# EAGLE board digitizer (EAGLE 9.6.1)
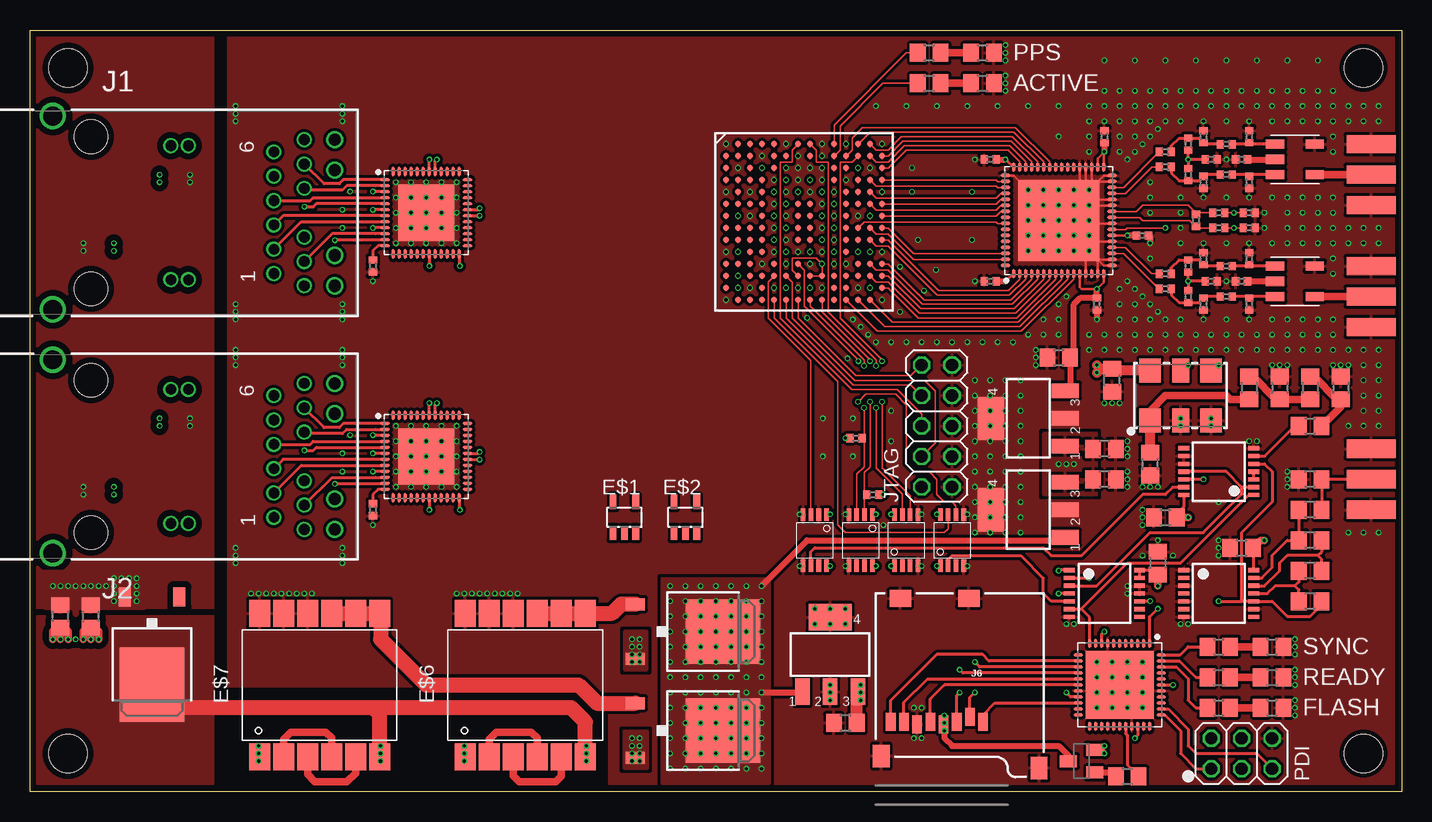
[diagram p0: board, top side]
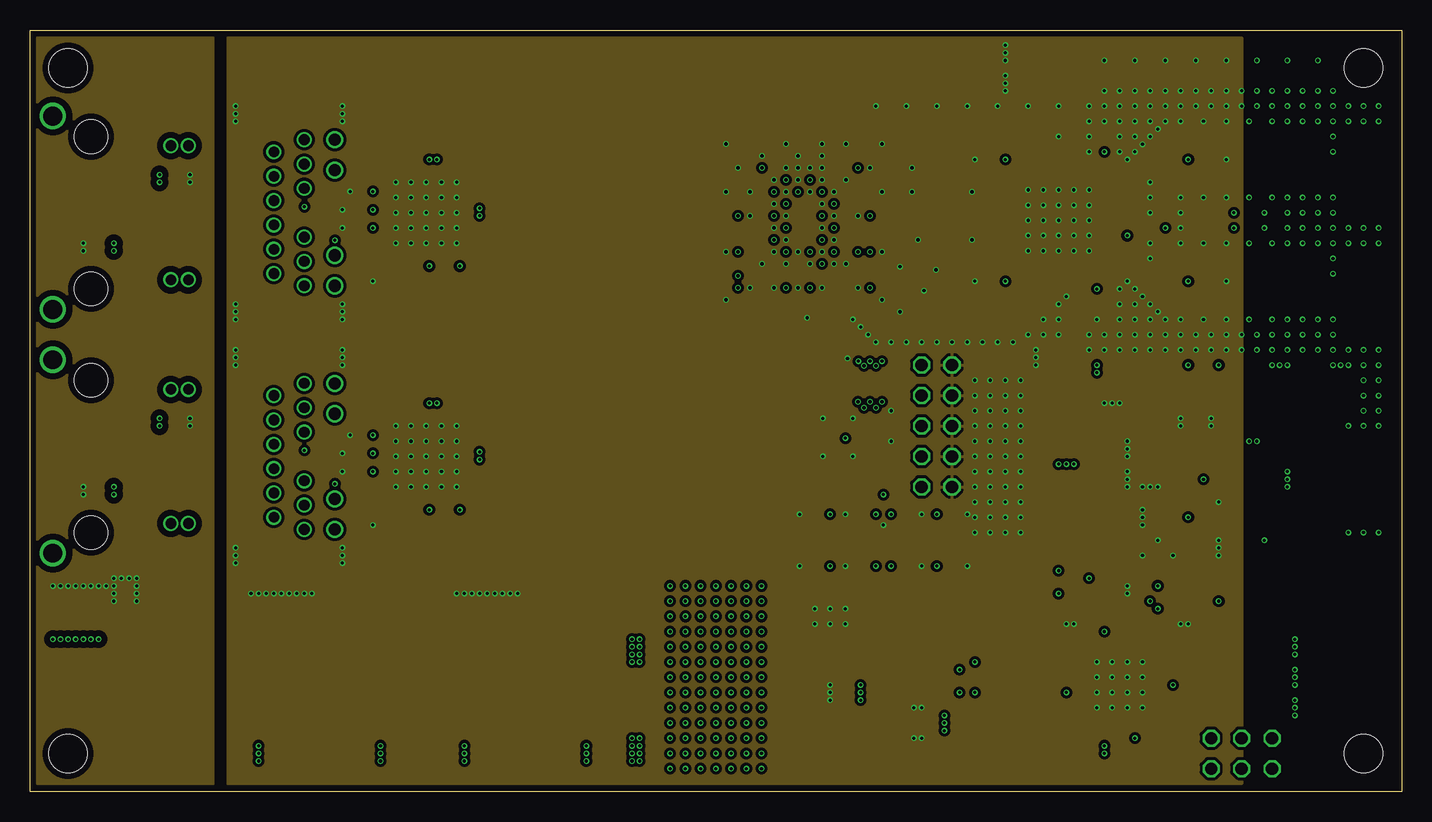
[diagram p1: board, inner layer Route2]
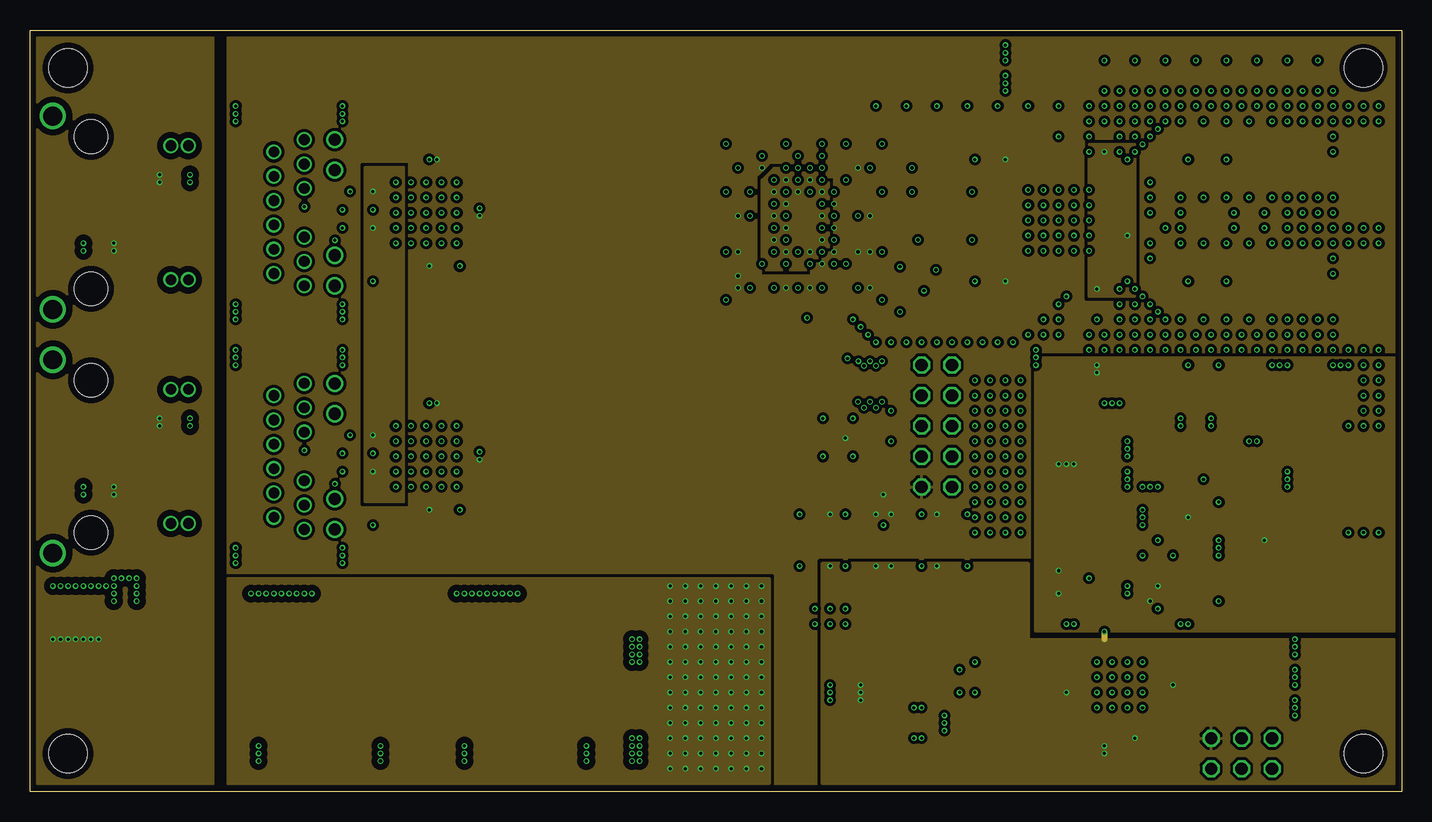
[diagram p2: board, inner layer Route15]
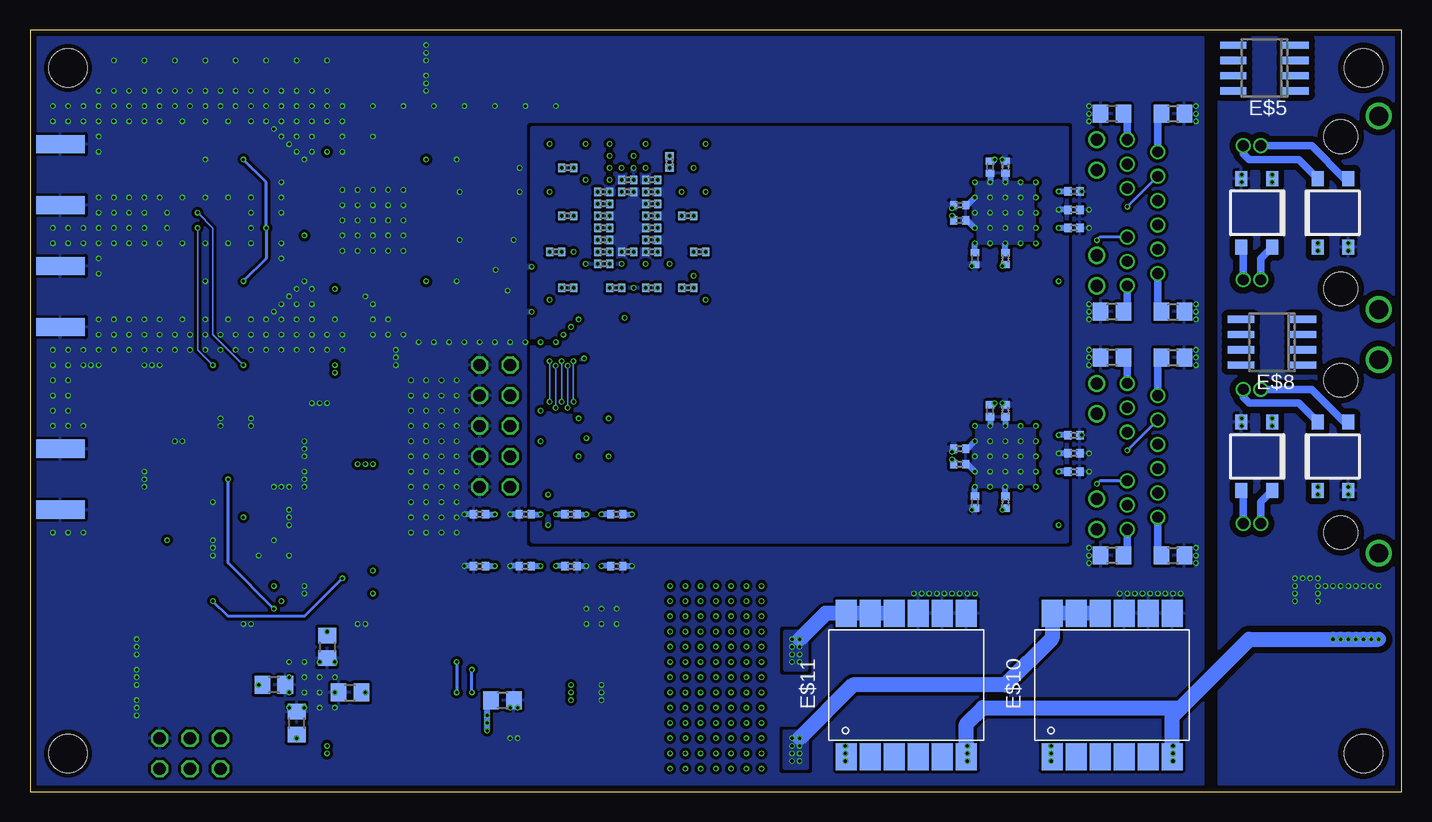
[diagram p3: board, bottom side, seen from below]

Size 114.3 x 63.5 mm. Coordinates in mm from the lower left corner, seen from the top.
Outline: 0,0 0,63.5 114.3,63.5 114.3,0 0,0
Copper layers (1*2*15*16): Top 0.0356mm / dielectric 0.17mm / Route2 0.0178mm / dielectric 47mil / Route15 0.0178mm / dielectric 0.17mm / Bottom 0.0356mm
Design rules "four_layer *": minimum track width 5mil, minimum drill 10mil, track to track 5mil, track to pad 5mil, pad to pad 5mil, via to via 5mil, smd to smd 5mil, copper to edge 15mil, drill to drill 5mil, minimum pad ring 4mil, minimum via ring 4mil, stop-mask expansion 4mil, vias tented up to drill 0mil, thermal gap 10mil
Holes 3.17 mm at 3.17,60.33 3.17,3.17 111.12,3.17 111.12,60.33

## Footprints (pad centres in the part's own frame; a part is rotated, then mirrored left to right if it is on the bottom)
R0805 = smd 1.3 x 1.5: 1 -0.95,0; 2 0.95,0
R0402 = smd 0.6 x 0.7: 1 -0.5,0; 2 0.5,0
TO-269AA = smd 1 x 1.25: + -1.28,-2.855; - 1.28,-2.855; AC1 -1.28,2.855; AC2 1.28,2.855
TO252 = smd 1 x 1.6: 1 -2.28,-4.8; 2 2.28,-4.8 | smd 5.4 x 6.2: 3 0,2.5
SOT23-5L = smd 0.55 x 1.2: 1 -0.95,-1.3; 2 0,-1.3; 3 0.95,-1.3; 4 0.95,1.3; 5 -0.95,1.3
MICRO8 = smd 0.38 x 1.05: 1 -0.975,-2.125; 2 -0.325,-2.125; 3 0.325,-2.125; 4 0.975,-2.125; 5 0.975,2.125; 6 0.325,2.125; 7 -0.325,2.125; 8 -0.975,2.125
SOIC8 = smd 0.6 x 2.2: 1 -1.905,-2.6; 2 -0.635,-2.6; 3 0.635,-2.6; 4 1.905,-2.6; 5 1.905,2.6; 6 0.635,2.6; 7 -0.635,2.6; 8 -1.905,2.6
WE-POE_ER11/5 = smd 2.25 x 1.75: 1 -5.975,5; 2 -5.975,3; 3 -5.975,1; 4 -5.975,-1; 5 -5.975,-3; 6 -5.975,-5; 7 5.975,-5; 8 5.975,-3; 9 5.975,-1; 10 5.975,1; 11 5.975,3; 12 5.975,5
7499811420 = drill 0.89: 1 -5.075,-15.24; 2 -3.045,-15.24; 3 -1.015,-15.24; 4 1.015,-15.24; 5 3.045,-15.24; 6 5.075,-15.24; 7 -6.09,-17.78; 8 -4.06,-17.78; 9 -2.03,-17.78; 10 2.03,-17.78; 11 4.06,-17.78; 12 6.09,-17.78 | drill 0.89 pad 1.168: 13 -5.59,-8.12; 14 5.59,-8.12; 15 -5.59,-6.66; 16 5.59,-6.66 | drill 1.02: 17 -6.09,-20.32; 18 -3.555,-20.32; 19 3.555,-20.32; 20 6.09,-20.32 | drill 1.57: Z1 -8.065,3.18; Z2 8.065,3.18 | hole 2.8: -6.35,0; 6.35,0
SMA-EDGE = smd 1.524 x 4.064: GND@0 0,0; GND@1 5.08,0; SIG 2.54,0 | smd 1.524 x 4.064 bottom: GND@2 0,0; GND@3 5.08,0
MICRO-SD-SOCKET = smd 1.8 x 1.4: CD1 -2.05,0.4; CD2 -7.75,0.4 | smd 0.8 x 1.5: CS -7.84,10.3; DI -6.74,10.7; DO -2.34,10.7; GND -3.44,10.9; RSV1 -8.94,10.7; RSV2 -1.24,10.7; SCLK -4.54,10.7; VCC -5.64,10.9 | smd 1.4 x 1.9: GND1 -13.6,14.55; GND3 -0.45,13.55
2X05 = drill 1.016 octagon: 1 -5.08,-1.27; 2 -5.08,1.27; 3 -2.54,-1.27; 4 -2.54,1.27; 5 0,-1.27; 6 0,1.27; 7 2.54,-1.27; 8 2.54,1.27; 9 5.08,-1.27; 10 5.08,1.27
2X03 = drill 1.016 octagon: 1 -2.54,-1.27; 2 -2.54,1.27; 3 0,-1.27; 4 0,1.27; 5 2.54,-1.27; 6 2.54,1.27
SOT23-BEC = smd 1 x 1.4: B -0.95,-1.1; C 0,1.1; E 0.95,-1.1
RF_BALUN_2.54 = smd 0.762 x 1.524: 1 1.27,-1.651; 2 0,-1.651; 3 -1.27,-1.651; 4 -1.27,1.651; 6 1.27,1.651
TSSOP14 = smd 0.35 x 0.9: 1 -1.95,-2.925; 2 -1.3,-2.925; 3 -0.65,-2.925; 4 0,-2.925; 5 0.65,-2.925; 6 1.3,-2.925; 7 1.95,-2.925; 8 1.95,2.925; 9 1.3,2.925; 10 0.65,2.925; 11 0,2.925; 12 -0.65,2.925; 13 -1.3,2.925; 14 -1.95,2.925
SOT223 = smd 1.219 x 2.235: 1 -2.311,-3.099; 2 0,-3.099; 3 2.311,-3.099 | smd 3.6 x 2.2: 4 0,3.099
QFN50P900X900X100-65T675 = smd 0.837 x 0.264: 1 -4.437,3.75; 2 -4.437,3.25; 3 -4.437,2.75; 4 -4.437,2.25; 5 -4.437,1.75; 6 -4.437,1.25; 7 -4.437,0.75; 8 -4.437,0.25; 9 -4.437,-0.25; 10 -4.437,-0.75; 11 -4.437,-1.25; 12 -4.437,-1.75; 13 -4.437,-2.25; 14 -4.437,-2.75; 15 -4.437,-3.25; 16 -4.437,-3.75; 33 4.437,-3.75; 34 4.437,-3.25; 35 4.437,-2.75; 36 4.437,-2.25; 37 4.437,-1.75; 38 4.437,-1.25; 39 4.437,-0.75; 40 4.437,-0.25; 41 4.437,0.25; 42 4.437,0.75; 43 4.437,1.25; 44 4.437,1.75; 45 4.437,2.25; 46 4.437,2.75; 47 4.437,3.25; 48 4.437,3.75 | smd 0.264 x 0.837: 17 -3.75,-4.437; 18 -3.25,-4.437; 19 -2.75,-4.437; 20 -2.25,-4.437; 21 -1.75,-4.437; 22 -1.25,-4.437; 23 -0.75,-4.437; 24 -0.25,-4.437; 25 0.25,-4.437; 26 0.75,-4.437; 27 1.25,-4.437; 28 1.75,-4.437; 29 2.25,-4.437; 30 2.75,-4.437; 31 3.25,-4.437; 32 3.75,-4.437; 49 3.75,4.437; 50 3.25,4.437; 51 2.75,4.437; 52 2.25,4.437; 53 1.75,4.437; 54 1.25,4.437; 55 0.75,4.437; 56 0.25,4.437; 57 -0.25,4.437; 58 -0.75,4.437; 59 -1.25,4.437; 60 -1.75,4.437; 61 -2.25,4.437; 62 -2.75,4.437; 63 -3.25,4.437; 64 -3.75,4.437 | smd 6.75 x 6.75: 65 0,0
FTGB196 = smd 0.508 x 0.508: A1 -6.5,6.5; A2 -5.5,6.5; A3 -4.5,6.5; A4 -3.5,6.5; A5 -2.5,6.5; A6 -1.5,6.5; A7 -0.5,6.5; A8 0.5,6.5; A9 1.5,6.5; A10 2.5,6.5; A11 3.5,6.5; A12 4.5,6.5; A13 5.5,6.5; A14 6.5,6.5; B1 -6.5,5.5; B2 -5.5,5.5; B3 -4.5,5.5; B4 -3.5,5.5; B5 -2.5,5.5; B6 -1.5,5.5; B7 -0.5,5.5; B8 0.5,5.5; B9 1.5,5.5; B10 2.5,5.5; B11 3.5,5.5; B12 4.5,5.5; B13 5.5,5.5; B14 6.5,5.5; C1 -6.5,4.5; C2 -5.5,4.5; C3 -4.5,4.5; C4 -3.5,4.5; C5 -2.5,4.5; C6 -1.5,4.5; C7 -0.5,4.5; C8 0.5,4.5; C9 1.5,4.5; C10 2.5,4.5; C11 3.5,4.5; C12 4.5,4.5; C13 5.5,4.5; C14 6.5,4.5; D1 -6.5,3.5; D2 -5.5,3.5; D3 -4.5,3.5; D4 -3.5,3.5; D5 -2.5,3.5; D6 -1.5,3.5; D7 -0.5,3.5; D8 0.5,3.5; D9 1.5,3.5; D10 2.5,3.5; D11 3.5,3.5; D12 4.5,3.5; D13 5.5,3.5; D14 6.5,3.5; E1 -6.5,2.5; E2 -5.5,2.5; E3 -4.5,2.5; E4 -3.5,2.5; E5 -2.5,2.5; E6 -1.5,2.5; E7 -0.5,2.5; E8 0.5,2.5; E9 1.5,2.5; E10 2.5,2.5; E11 3.5,2.5; E12 4.5,2.5; E13 5.5,2.5; E14 6.5,2.5; F1 -6.5,1.5; F2 -5.5,1.5; F3 -4.5,1.5; F4 -3.5,1.5; F5 -2.5,1.5; F6 -1.5,1.5; F7 -0.5,1.5; F8 0.5,1.5; F9 1.5,1.5; F10 2.5,1.5; F11 3.5,1.5; F12 4.5,1.5; F13 5.5,1.5; F14 6.5,1.5; G1 -6.5,0.5; G2 -5.5,0.5; G3 -4.5,0.5; G4 -3.5,0.5; G5 -2.5,0.5; G6 -1.5,0.5; G7 -0.5,0.5; G8 0.5,0.5; G9 1.5,0.5; G10 2.5,0.5; G11 3.5,0.5; G12 4.5,0.5; G13 5.5,0.5; G14 6.5,0.5; H1 -6.5,-0.5; H2 -5.5,-0.5; H3 -4.5,-0.5; H4 -3.5,-0.5; H5 -2.5,-0.5; H6 -1.5,-0.5; H7 -0.5,-0.5; H8 0.5,-0.5; H9 1.5,-0.5; H10 2.5,-0.5; H11 3.5,-0.5; H12 4.5,-0.5; H13 5.5,-0.5; H14 6.5,-0.5; J1 -6.5,-1.5; J2 -5.5,-1.5; J3 -4.5,-1.5; J4 -3.5,-1.5; J5 -2.5,-1.5; J6 -1.5,-1.5; J7 -0.5,-1.5; J8 0.5,-1.5; J9 1.5,-1.5; J10 2.5,-1.5; J11 3.5,-1.5; J12 4.5,-1.5; J13 5.5,-1.5; J14 6.5,-1.5; K1 -6.5,-2.5; K2 -5.5,-2.5; K3 -4.5,-2.5; K4 -3.5,-2.5; K5 -2.5,-2.5; K6 -1.5,-2.5; K7 -0.5,-2.5; K8 0.5,-2.5; K9 1.5,-2.5; K10 2.5,-2.5; K11 3.5,-2.5; K12 4.5,-2.5; K13 5.5,-2.5; K14 6.5,-2.5; L1 -6.5,-3.5; L2 -5.5,-3.5; L3 -4.5,-3.5; L4 -3.5,-3.5; L5 -2.5,-3.5; L6 -1.5,-3.5; L7 -0.5,-3.5; L8 0.5,-3.5; L9 1.5,-3.5; L10 2.5,-3.5; L11 3.5,-3.5; L12 4.5,-3.5; L13 5.5,-3.5; L14 6.5,-3.5; M1 -6.5,-4.5; M2 -5.5,-4.5; M3 -4.5,-4.5; M4 -3.5,-4.5; M5 -2.5,-4.5; M6 -1.5,-4.5; M7 -0.5,-4.5; M8 0.5,-4.5; M9 1.5,-4.5; M10 2.5,-4.5; M11 3.5,-4.5; M12 4.5,-4.5; M13 5.5,-4.5; M14 6.5,-4.5; N1 -6.5,-5.5; N2 -5.5,-5.5; N3 -4.5,-5.5; N4 -3.5,-5.5; N5 -2.5,-5.5; N6 -1.5,-5.5; N7 -0.5,-5.5; N8 0.5,-5.5; N9 1.5,-5.5; N10 2.5,-5.5; N11 3.5,-5.5; N12 4.5,-5.5; N13 5.5,-5.5; N14 6.5,-5.5; P1 -6.5,-6.5; P2 -5.5,-6.5; P3 -4.5,-6.5; P4 -3.5,-6.5; P5 -2.5,-6.5; P6 -1.5,-6.5; P7 -0.5,-6.5; P8 0.5,-6.5; P9 1.5,-6.5; P10 2.5,-6.5; P11 3.5,-6.5; P12 4.5,-6.5; P13 5.5,-6.5; P14 6.5,-6.5
QFN50P700X700X100-49T470 = smd 0.837 x 0.264: 1 -3.437,2.75; 2 -3.437,2.25; 3 -3.437,1.75; 4 -3.437,1.25; 5 -3.437,0.75; 6 -3.437,0.25; 7 -3.437,-0.25; 8 -3.437,-0.75; 9 -3.437,-1.25; 10 -3.437,-1.75; 11 -3.437,-2.25; 12 -3.437,-2.75; 25 3.437,-2.75; 26 3.437,-2.25; 27 3.437,-1.75; 28 3.437,-1.25; 29 3.437,-0.75; 30 3.437,-0.25; 31 3.437,0.25; 32 3.437,0.75; 33 3.437,1.25; 34 3.437,1.75; 35 3.437,2.25; 36 3.437,2.75 | smd 0.264 x 0.837: 13 -2.75,-3.437; 14 -2.25,-3.437; 15 -1.75,-3.437; 16 -1.25,-3.437; 17 -0.75,-3.437; 18 -0.25,-3.437; 19 0.25,-3.437; 20 0.75,-3.437; 21 1.25,-3.437; 22 1.75,-3.437; 23 2.25,-3.437; 24 2.75,-3.437; 37 2.75,3.437; 38 2.25,3.437; 39 1.75,3.437; 40 1.25,3.437; 41 0.75,3.437; 42 0.25,3.437; 43 -0.25,3.437; 44 -0.75,3.437; 45 -1.25,3.437; 46 -1.75,3.437; 47 -2.25,3.437; 48 -2.75,3.437 | smd 4.7 x 4.7: 49 0,0
QFN50P700X700X100-45T565 = smd 0.811 x 0.264: 1 -3.451,2.5; 2 -3.451,2; 3 -3.451,1.5; 4 -3.451,1; 5 -3.451,0.5; 6 -3.451,0; 7 -3.451,-0.5; 8 -3.451,-1; 9 -3.451,-1.5; 10 -3.451,-2; 11 -3.451,-2.5; 23 3.451,-2.5; 24 3.451,-2; 25 3.451,-1.5; 26 3.451,-1; 27 3.451,-0.5; 28 3.451,0; 29 3.451,0.5; 30 3.451,1; 31 3.451,1.5; 32 3.451,2; 33 3.451,2.5 | smd 0.264 x 0.811: 12 -2.5,-3.451; 13 -2,-3.451; 14 -1.5,-3.451; 15 -1,-3.451; 16 -0.5,-3.451; 17 0,-3.451; 18 0.5,-3.451; 19 1,-3.451; 20 1.5,-3.451; 21 2,-3.451; 22 2.5,-3.451; 34 2.5,3.451; 35 2,3.451; 36 1.5,3.451; 37 1,3.451; 38 0.5,3.451; 39 0,3.451; 40 -0.5,3.451; 41 -1,3.451; 42 -1.5,3.451; 43 -2,3.451; 44 -2.5,3.451 | smd 5.65 x 5.65: 45 0,0
OSCILLATOR-SMD-7.5X5.2-6PIN = smd 1.8 x 2: 1 -2.54,-2.1; 2 2.54,-2.1; 3 2.54,2.1; 4 -2.54,2.1 | smd 1.4 x 2: NC0 0,-2.1; NC1 0,2.1

## Placement (x,y rotation side)
C1  1n  [R0805]  106.68,23.5 180 top
C2  1n  [R0805]  106.68,18.41 180 top
C3  [R0805]  109.22,33.66 270 top
C4  [R0805]  104.14,33.66 270 top
C5  [R0805]  93.34,27.3 90 top
C6  [R0805]  90.17,34.29 90 top
C7  [R0805]  89.53,28.57 180 top
C8  [R0805]  89.53,26.04 180 top
C9  [R0805]  85.72,36.2 0 top
C10  [R0805]  94.61,22.86 0 top
C11  [R0805]  100.97,20.32 0 top
C12  [R0805]  93.98,19.05 270 top
C13  [R0805]  74.93,7.62 0 bottom
C14  [R0805]  19.05,56.52 0 bottom
C15  [R0805]  24.13,56.52 180 bottom
C16  [R0805]  24.13,40.01 180 bottom
C17  [R0805]  24.13,36.2 180 bottom
C18  [R0805]  19.05,40.01 0 bottom
C19  [R0805]  19.05,36.2 0 bottom
C20  [R0805]  19.05,19.68 0 bottom
C21  [R0805]  24.13,19.68 180 bottom
C22  [R0402]  27.3,50.04 0 bottom
C23  [R0402]  27.3,48.51 0 bottom
C24  [R0402]  27.3,46.99 0 bottom
C25  [R0402]  27.3,29.72 0 bottom
C26  [R0402]  27.3,28.19 0 bottom
C27  [R0402]  27.3,26.67 0 bottom
C28  [R0805]  2.54,14.61 90 top
C29  [R0805]  5.08,14.61 90 top
C30  [R0805]  67.94,5.71 180 top
C31  100n  [R0402]  59.5,48 180 bottom
C32  100n  [R0402]  58.5,45 0 bottom
C33  100n  [R0402]  59.5,42 180 bottom
C34  100n  [R0402]  62.5,42 0 bottom
C35  100n  [R0402]  65.5,42 180 bottom
C36  100n  [R0402]  69.5,42 0 bottom
C37  100n  [R0402]  69.5,48 0 bottom
C38  100n  [R0402]  70.5,45 180 bottom
C39  100n  [R0402]  66.5,49 0 bottom
C40  100n  [R0402]  66.5,47 0 bottom
C41  100n  [R0402]  66.5,45 0 bottom
C42  100n  [R0402]  66.5,44 0 bottom
C43  100n  [R0402]  66.5,50 0 bottom
C44  100n  [R0402]  64.5,50 0 bottom
C45  100n  [R0402]  62.5,50 0 bottom
C46  100n  [R0402]  62.5,51 0 bottom
C47  100n  [R0402]  64.5,51 0 bottom
C48  100n  [R0402]  62.5,49 0 bottom
C49  100n  [R0402]  62.5,48 0 bottom
C50  100n  [R0402]  62.5,47 0 bottom
C51  100n  [R0402]  62.5,46 0 bottom
C52  100n  [R0402]  62.5,45 0 bottom
C53  100n  [R0402]  64.5,45 0 bottom
C54  100n  [R0402]  66.5,46 0 bottom
C55  100n  [R0402]  66.5,48 0 bottom
C56  100n  [R0402]  61,52.5 90 bottom
C57  100n  [R0402]  69.5,52 180 bottom
C58  [R0805]  87.63,8.26 0 bottom
C59  [R0805]  89.53,12.06 270 bottom
C60  [R0805]  93.98,8.89 180 bottom
C61  [R0805]  92.08,5.71 90 bottom
C62  [R0402]  33.02,52.07 270 bottom
C63  [R0402]  34.29,52.07 270 bottom
C64  [R0402]  36.83,48.9 0 bottom
C65  [R0402]  36.83,47.62 0 bottom
C66  [R0402]  35.56,44.45 90 bottom
C67  [R0402]  33.02,44.45 90 bottom
C68  [R0402]  33.02,24.13 90 bottom
C69  [R0402]  35.56,24.13 90 bottom
C70  [R0402]  36.83,27.3 0 bottom
C71  [R0402]  36.83,28.57 0 bottom
C72  [R0402]  34.29,31.75 270 bottom
C73  [R0402]  33.02,31.75 270 bottom
C74  [R0402]  65.41,23.11 0 bottom
C75  [R0402]  69.22,23.11 0 bottom
C76  [R0402]  73.03,23.11 0 bottom
C77  [R0402]  69.22,18.8 0 bottom
C78  [R0402]  65.41,18.8 0 bottom
C79  [R0402]  73.03,18.8 0 bottom
C80  [R0402]  76.83,23.11 0 bottom
C81  [R0402]  76.83,18.8 0 bottom
C82  [R0402]  68.83,29.46 0 top
C83  [R0402]  70.23,24.77 0 top
D1  49.9  [R0805]  79.38,61.59 0 top
D2  49.9  [R0805]  79.38,59.05 0 top
D3  MB1S  [TO-269AA]  5.71,48.26 0 bottom
D4  MB1S  [TO-269AA]  12.06,48.26 180 bottom
D5  MB1S  [TO-269AA]  5.71,27.94 0 bottom
D6  MB1S  [TO-269AA]  12.06,27.94 180 bottom
D7  RBR10BM30AFH  [TO252]  55.24,13.34 270 top
D8  RBR10BM30AFH  [TO252]  55.24,5.08 270 top
D9  49.9  [R0805]  103.5,12.06 0 top
D10  49.9  [R0805]  103.5,9.53 0 top
D11  49.9  [R0805]  103.5,6.99 0 top
E$1  [SOT23-5L]  49.53,22.86 0 top
E$2  [SOT23-5L]  54.61,22.86 0 top
E$3  [MICRO8]  69.22,20.95 180 top
E$4  [R0402]  80.01,42.55 0 top
E$5  [SOIC8]  11.43,60.33 90 bottom
E$6  [WE-POE_ER11/5]  41.27,8.89 90 top
E$7  [WE-POE_ER11/5]  24.13,8.89 90 top
E$8  [SOIC8]  10.79,37.47 90 bottom
E$9  [R0402]  80.01,52.7 0 top
E$10  [WE-POE_ER11/5]  24.13,8.89 90 bottom
E$11  [WE-POE_ER11/5]  41.27,8.89 90 bottom
E$12  [MICRO8]  65.41,20.95 180 top
E$13  100n  [R0402]  99.06,48.26 0 top
E$14  100n  [R0402]  99.06,46.99 0 top
E$15  100  [R0402]  97.16,47.62 90 top
E$16  240  [R0402]  101.6,48.26 0 top
E$17  [R0402]  100.97,52.7 0 top
E$18  [R0402]  100.97,42.55 0 top
E$19  [R0402]  101.6,54.61 270 top
E$20  [R0402]  99.69,53.98 0 top
E$21  [R0402]  97.79,54.61 90 top
E$22  [R0402]  101.6,44.45 270 top
E$23  [R0402]  99.69,51.44 0 top
E$24  [R0402]  97.79,50.8 90 top
E$25  [R0402]  96.52,51.44 90 top
E$26  [R0402]  96.52,53.98 90 top
E$27  [R0402]  94.61,53.34 180 top
E$28  [R0402]  94.61,52.07 180 top
E$29  [R0402]  101.6,40.64 270 top
E$30  [R0402]  99.69,41.27 0 top
E$31  [R0402]  99.69,43.81 0 top
E$32  [R0402]  97.79,44.45 90 top
E$33  [R0402]  97.79,40.64 90 top
E$34  [R0402]  96.52,43.81 90 top
E$35  [R0402]  96.52,41.27 90 top
E$36  [R0402]  94.61,43.18 180 top
E$37  [R0402]  94.61,41.91 180 top
E$38  [R0402]  98.42,52.7 0 top
E$39  [R0402]  98.42,42.55 0 top
E$40  [R0402]  101.6,50.8 270 top
E$41  [R0402]  92.71,46.35 180 top
E$42  [R0402]  88.9,40.64 90 top
E$43  [R0402]  89.53,54.61 270 top
E$44  [MICRO8]  73.03,20.95 0 top
E$45  [MICRO8]  76.83,20.95 0 top
E$46  240  [R0402]  101.6,46.99 0 top
J1  [7499811420]  5.08,48.26 90 top
J2  [7499811420]  5.08,27.94 90 top
J3  [SMA-EDGE]  111.76,48.9 90 top
J4  [SMA-EDGE]  111.76,38.73 90 top
J5  [SMA-EDGE]  111.76,23.5 90 top
J6  [MICRO-SD-SOCKET]  70.48,16.51 180 top
JTAG  [2X05]  75.56,30.48 90 top
PDI  [2X03]  100.97,3.17 0 top
Q1  IPD530N15N3GATMA1  [TO252]  10.16,11.43 180 top
Q2  MMBT3906  [SOT23-BEC]  87.63,2.54 90 top
R1  49.9  [R0805]  106.68,26.04 180 top
R2  33k  [R0805]  106.68,20.95 180 top
R3  33k  [R0805]  106.68,15.88 180 top
R4  [R0805]  106.68,30.48 0 top
R5  [R0805]  106.68,33.66 270 top
R6  [R0805]  101.6,33.66 270 top
R7  330  [R0805]  99.06,12.06 0 top
R8  330  [R0805]  74.93,61.59 0 top
R9  330  [R0805]  74.93,59.05 0 top
R10  [R0402]  28.57,43.81 270 top
R11  [R0402]  28.57,23.5 270 top
R12  330  [R0805]  99.06,9.53 0 top
R13  330  [R0805]  99.06,6.99 0 top
R14  2.2k  [R0805]  91.44,1.27 0 top
T1  [RF_BALUN_2.54]  105.41,52.7 270 top
T2  [RF_BALUN_2.54]  105.41,42.55 270 top
U1  [TSSOP14]  99.06,16.51 270 top
U2  [TSSOP14]  99.06,26.67 90 top
U3  74LVC74A  [TSSOP14]  89.53,16.51 270 top
U4  [SOT223]  83.19,23.5 90 top
U5  [SOT223]  83.19,31.11 90 top
U6  ADS4229  [QFN50P900X900X100-65T675]  85.72,47.62 90 top
U7  [FTGB196]  64.5,47.5 0 top
U8  [QFN50P700X700X100-49T470]  33.02,48.26 0 top
U9  [QFN50P700X700X100-49T470]  33.02,27.94 0 top
U10  [SOT223]  66.67,11.43 0 top
U11  [QFN50P700X700X100-45T565]  90.81,8.89 270 top
X1  SIT3373AC-1E2-33NE250.000000X  [OSCILLATOR-SMD-7.5X5.2-6PIN]  95.89,33.02 0 top

## Library data of the parts
C1-C83 D1 D2 D9-D11 E$4 E$9 E$13-E$43 E$46 R1-R14 = rcl
D3-D6 = rectifier
D7 D8 Q1 = transistor-fet
E$1 E$2 E$5 E$8 = ref-packages
E$3 E$12 E$44 E$45 = on-semiconductor
E$6 E$7 E$10 E$11 J1 J2 = Wurth_Elektronik_Passive_rev19e
J3-J5 = SparkFun-Retired
J6 = SparkFun-Connectors
JTAG PDI = pinhead
Q2 = ref-packages-longpad
T1 T2 = misc
U1-U3 = 74xx-us
U4 U5 U10 = transistor
U6 U8 U9 U11 = ref-packages-3d
U7 = custom
X1 = SparkFun-Clocks

## Nets
!INIT: C82.2 E$3.3 U7.P8
!PPS: U2.1 U3.6 U11.11
!PROGRAM: E$45.6 U7.L7
!SCS: J6.CS U11.14
!SEN: R14.2 U11.29
ALIGN: R4.1 U2.6
AMP1: C1.2 R2.2 U1.13
AMP2: C2.1 R2.1 U1.12
AMP3: C2.2 R3.2 U1.11
AVDD: C9.2 E$41.2 E$42.2 E$43.2 U5.3 U6.12 U6.16 U6.22 U6.33 U6.34
BPSK: R3.1 U1.10 U2.5 U3.2
CCK: E$44.7 U7.A8
CLK_25M: E$12.6 U2.13
CLK_25M_A: E$12.3 U7.M5
DA0: U6.42 U7.B11
DA1: U6.43 U7.A12
DA2: U6.44 U7.A13
DA3: U6.45 U7.B14
DA4: U6.46 U7.B13
DA5: U6.47 U7.C14
DA6: U6.50 U7.D14
DA7: U6.51 U7.D13
DA8: U6.52 U7.E13
DA9: U6.53 U7.F14
DA10: U6.54 U7.F13
DA11: U6.55 U7.G14
DB0: U6.62 U7.H14
DB1: U6.63 U7.H13
DB2: U6.2 U7.J14
DB3: U6.3 U7.J13
DB4: U6.4 U7.L14
DB5: U6.5 U7.L13
DB6: U6.6 U7.M14
DB7: U6.7 U7.M13
DB8: U6.8 U7.N14
DB9: U6.9 U7.P13
DB10: U6.10 U7.P12
DB11: U6.11 U7.P11
DCLK: U6.57 U7.H12
DIN: E$44.6 U7.B12
DONE: C83.1 E$3.2 U7.P9
FB: C5.2 R6.2 X1.1
FILT1: C3.2 R4.2 R5.1
FILT2: C4.2 R5.2 R6.1
FPPS: E$45.7 U7.P5
GND: C3.1 C4.1 C5.1 C6.1 C7.1 C8.1 C9.1 C10.1 C11.1 C12.1 C13.2 C14.2 C15.2 C16.2 C17.2 C18.2 C19.2 C20.2 C21.2 C22.2 C23.2 C24.2 C25.2 C26.2 C27.2 C30.2 C31.2 C32.2 C33.2 C34.2 C35.2 C36.2 C37.2 C38.2 C39.2 C40.2 C41.2 C42.1 C43.1 C44.1 C45.1 C46.2 C47.2 C48.2 C49.1 C50.2 C51.1 C52.2 C53.2 C54.1 C55.1 C56.2 C57.2 C58.1 C59.2 C60.1 C61.2 C62.2 C63.2 C64.2 C65.2 C66.2 C67.2 C68.2 C69.2 C70.2 C71.2 C72.2 C73.2 C74.2 C75.2 C76.1 C77.2 C78.2 C79.1 C80.1 C81.1 D1.2 D2.2 D9.2 D10.2 D11.2 E$3.4 E$3.5 E$4.1 E$6.10 E$6.11 E$6.12 E$7.10 E$7.11 E$7.12 E$9.1 E$10.7 E$10.8 E$10.9 E$11.7 E$11.8 E$11.9 E$12.2 E$12.4 E$12.5 E$16.2 E$17.1 E$18.1 E$19.1 E$21.2 E$22.1 E$24.1 E$29.2 E$32.2 E$33.1 E$38.2 E$39.2 E$40.2 E$41.1 E$42.1 E$43.1 E$44.4 E$44.5 E$45.4 E$45.5 E$46.2 J3.GND@0 J3.GND@1 J3.GND@2 J3.GND@3 J4.GND@0 J4.GND@1 J4.GND@2 J4.GND@3 J5.GND@0 J5.GND@1 J5.GND@2 J5.GND@3 J6.CD1 J6.CD2 J6.GND J6.GND1 J6.GND3 JTAG.1 JTAG.3 JTAG.5 JTAG.7 JTAG.9 PDI.6 R1.2 R10.2 R11.2 T1.4 T2.4 U1.1 U1.3 U1.5 U1.7 U1.9 U2.7 U2.9 U2.10 U3.7 U3.11 U3.12 U4.2 U4.4 U5.2 U5.4 U6.13 U6.15 U6.17 U6.18 U6.21 U6.24 U6.27 U6.28 U6.31 U6.32 U6.35 U6.36 U6.37 U6.49 U6.65 U7.A1 U7.A6 U7.A9 U7.A11 U7.A14 U7.B4 U7.B7 U7.B9 U7.C2 U7.C6 U7.C7 U7.C8 U7.C9 U7.C13 U7.D5 U7.D7 U7.D9 U7.D11 U7.E1 U7.E3 U7.E6 U7.E8 U7.E10 U7.E14 U7.F5 U7.F9 U7.G3 U7.G6 U7.G10 U7.G12 U7.H5 U7.H9 U7.J6 U7.J10 U7.K1 U7.K5 U7.K7 U7.K9 U7.K14 U7.L4 U7.L6 U7.L8 U7.L10 U7.L11 U7.N3 U7.N5 U7.N7 U7.N9 U7.N12 U7.P1 U7.P14 U8.49 U9.49 U10.2 U10.4 U11.8 U11.18 U11.30 U11.38 U11.45 X1.2 X1.NC0
IF1: J3.SIG T1.6
IF2: J4.SIG T2.6
INV: U2.12 U11.1
LCLK: U2.3 U2.4
OCLK: U2.2 U2.11 U3.3
PDI_CLK: PDI.5 U11.35
PDI_DAT: PDI.1 U11.34
POE+: C28.1 C29.1 D3.+ D4.+ D5.+ D6.+ E$6.1 E$7.1 E$10.6 E$11.6
POE-: C28.2 C29.2 D3.- D4.- D5.- D6.- Q1.2
POE_SW: E$6.6 E$7.6 E$10.1 E$11.1 Q1.3
PPS: E$45.2 U3.5
RECT1: D7.1 E$6.7 E$6.8 E$6.9
RECT2: D7.2 E$11.10 E$11.11 E$11.12
RECT3: D8.1 E$7.7 E$7.8 E$7.9
RECT4: D8.2 E$10.10 E$10.11 E$10.12
REF: C1.1 J5.SIG R1.1
S$1: E$13.1 E$15.2 U6.26
S$2: E$17.2 T1.2
S$3: E$18.2 T2.2
S$4: D1.1 R8.2
S$5: D2.1 R9.2
S$6: E$25.2 E$26.1 E$34.1 E$35.2 E$38.1 E$39.1 U6.23
S$7: E$19.2 E$20.2 T1.3
S$8: E$20.1 E$21.1 E$26.2 E$27.1
S$9: E$23.1 E$24.2 E$25.1 E$28.1
S$10: E$23.2 E$40.1 T1.1
S$11: E$22.2 E$31.2 T2.3
S$12: E$29.1 E$30.2 T2.1
S$13: E$31.1 E$32.1 E$34.2 E$36.1
S$14: E$30.1 E$33.2 E$35.1 E$37.1
S$15: E$27.2 U6.30
S$16: E$28.2 U6.29
S$17: E$36.2 U6.20
S$18: E$37.2 U6.19
S$19: E$14.1 E$15.1 U6.25
S$20: E$13.2 E$16.1 X1.NC1
S$21: E$14.2 E$46.1 X1.3
S$22: J1.11 U8.1
S$23: J1.10 U8.2
S$24: C14.1 J1.6
S$25: C15.1 J1.12
S$26: C18.1 J1.1
S$27: C16.1 J1.7
S$28: C19.1 J2.6
S$29: C17.1 J2.12
S$30: C20.1 J2.1
S$31: C21.1 J2.7
S$32: J1.5 U8.5
S$33: J1.4 U8.4
S$34: J1.3 U8.7
S$35: J1.2 U8.8
S$36: J1.8 U8.10
S$37: J1.9 U8.11
S$38: J2.11 U9.1
S$39: J2.10 U9.2
S$40: J2.4 U9.4
S$41: J2.5 U9.5
S$42: J2.3 U9.7
S$43: J2.2 U9.8
S$44: J2.8 U9.10
S$45: J2.9 U9.11
S$46: R10.1 U8.12
S$47: R11.1 U9.12
S$48: D3.AC1 J1.14
S$49: D3.AC2 J1.16
S$50: D4.AC1 J1.15
S$51: D4.AC2 J1.13
S$52: D5.AC1 J2.14
S$53: D5.AC2 J2.16
S$54: D6.AC2 J2.13
S$55: D6.AC1 J2.15
S$56: E$7.2 E$7.4
S$57: E$6.2 E$6.4
S$58: E$7.3 E$7.5
S$59: E$6.3 E$6.5
S$60: D9.1 R7.2
S$61: D10.1 R12.2
S$62: D11.1 R13.2
S$63: R8.1 U7.A10
S$64: Q2.B R14.1
S$65: R9.1 U7.B10
S$66: U11.37
S$67: R7.1 U11.44
S$68: R12.1 U11.43
S$69: R13.1 U11.42
S$70: JTAG.4 U7.M6
S$71: JTAG.8 U7.P6
S$72: JTAG.10 U7.P7
S$73: JTAG.6 U7.A7
SCLK: J6.SCLK U11.17
SDI: J6.DI U11.15
SDO: J6.DO U11.16
SR1: J6.RSV2 U11.13
SR2: J6.RSV1 U11.20
V1.0: C23.1 C26.1 C43.2 C44.2 C45.2 C46.1 C47.1 C48.1 C49.2 C50.1 C51.2 C52.1 C53.1 C54.2 C55.2 C62.1 C64.1 C66.1 C69.1 C71.1 C73.1 U7.D6 U7.D8 U7.E5 U7.E7 U7.E9 U7.F6 U7.G5 U7.G9 U7.H6 U7.J5 U7.J9 U7.K6 U7.K8 U8.6 U8.24 U8.31 U8.42 U9.6 U9.24 U9.31 U9.42
V1.8: C31.1 C32.1 C33.1 C34.1 C35.1 C36.1 C37.1 C38.1 C39.1 C40.1 C41.1 C42.2 C56.1 C57.1 C63.1 C65.1 C67.1 C68.1 C70.1 C72.1 C74.1 C75.1 C76.2 C80.2 C82.1 C83.2 E$3.1 E$4.2 E$9.2 E$12.1 E$44.8 E$45.8 JTAG.2 U6.1 U6.48 U7.C4 U7.C12 U7.F10 U7.G2 U7.G13 U7.H10 U7.K2 U7.K10 U7.K12 U7.K13 U7.L9 U7.M2 U7.M7 U7.M8 U7.M9 U7.N2 U7.N6 U7.N8 U7.N13 U8.19 U8.30 U8.41 U9.19 U9.30 U9.41
V2.5: C22.1 C24.1 C25.1 C27.1 U8.3 U8.9 U9.3 U9.9
V3.3: C6.2 C7.2 C8.2 C10.2 C11.2 C12.2 U1.14 U2.14 U3.1 U3.4 U3.10 U3.13 U3.14 U4.3 U5.1 X1.4
V3.3D: C30.1 C58.2 C59.1 C60.2 C61.1 C77.1 C78.1 C79.2 C81.2 E$3.8 E$12.8 E$44.1 E$45.1 PDI.2 Q2.E U10.3 U11.9 U11.19 U11.31 U11.39
V5: D7.3 D8.3 U4.1 U10.1
VSDC: C13.1 J6.VCC Q2.C

## Tracks (layer width: path | path; a pad name or v marks a point on that pad's centre or on a via)
!INIT  (via drill 0.25)
  Top 0.127: U7.P8 65,40.5 69.5,36 v69.5,35.5 | 69.5,29.3 v69.5,32 | E$3.3 68.89,26.47 69.5,27.08 69.5,29.21 69.5,29.3 | C82.2 69.5,29.3
  Bottom 0.127: v69.5,35.5 v69.5,32
!PPS
  Top 0.254: U2.1 101.56,24.72 95.89,19.05 91.44,19.05 87.6,15.21 | U3.6 87.6,15.21 | U11.11 88.31,14.51 87.6,15.21
!PROGRAM  (via drill 0.25)
  Top 0.127: U7.L7 64.5,43.5 64.5,40.5 69.03,35.97 v69.03,35.88 | v69,32.5 69.63,33.13 72.14,33.13 73.03,32.24 73.03,27.3 73.66,26.67 74.93,26.67 75.56,26.04 75.56,24.77 76.2,24.13 76.83,24.13 77.16,23.8 E$45.6
  Bottom 0.127: v69.03,35.88 69.03,32.53 v69,32.5
!SCS  (via drill 0.25)
  Top 0.254: U11.14 79.14,10.39 v78.74,10.79 | J6.CS 78.33,7.84 v78.74,8.26
  Bottom 0.254: v78.74,10.79 v78.74,8.26
!SEN
  Top 0.254: U11.29 91.31,4.83 91.44,4.7 91.44,2.22 R14.2
ALIGN
  Top 0.254: U2.6 102.9,27.97 105.41,30.48 R4.1
AMP1
  Top 0.254: C1.2 R2.2 104.78,20.95 103.5,19.68 103.5,18.67 102.65,17.81 U1.13
AMP2
  Top 0.254: U1.12 102,17.14 102.87,17.14 104.14,18.41 104.14,19.05 104.78,19.68 107.31,19.68 | R2.1 107.63,20 107.31,19.68 | C2.1 107.63,19.37 107.31,19.68
AMP3
  Top 0.254: U1.11 103.12,16.51 103.76,17.14 105.41,17.14 | C2.2 105.73,17.46 105.41,17.14 | R3.2 105.73,16.82 105.41,17.14
AVDD  (via drill 0.25)
  Top 0.203: U6.22 91.42,46.38 v91.44,46.35 | U6.16 89.47,42.48 v88.9,41.91 87.63,41.91 87.47,42.06 U6.12 | U6.34 88.97,52.78 v89.53,53.34 89.47,53.28 U6.33
  Top 0.508: E$41.2 v91.44,46.35 | v88.9,41.91 E$42.2 87.5,41.14 87,40.64 87,36.83 86.67,36.51 C9.2 86.67,33.82 U5.3 | E$43.2 v89.53,53.34
  pour Route15 (isolate 0.254): 88.27,53.98 92.08,53.98 92.08,41.27 88.27,41.27
BPSK  (via drill 0.25)
  Top 0.254: R3.1 107.63,15.55 106.68,14.61 104.78,14.61 103.5,15.88 102,15.88 U1.10 100.98,15.86 100.97,15.88 | 100.97,15.88 100.97,21.59 103.5,24.13 103.5,26.67 102.86,27.32 U2.5 | U3.2 88.23,17.81 v88.27,17.78 | v99.06,15.88 100.97,15.88
  Bottom 0.254: v88.27,17.78 91.44,14.61 97.79,14.61 v99.06,15.88
CCK  (via drill 0.25)
  Top 0.127: U7.A8 65.5,53.5 65.5,52.5 66.5,52.5 66.5,40 70.5,36 v70.5,35.5 | v70.5,32 70.5,27 72.7,24.8 E$44.7
  Bottom 0.127: v70.5,35.5 v70.5,32
CLK_25M
  Top 0.254: E$12.6 65.08,20 65.41,20.32 84.45,20.32 85.09,19.68 87.63,19.68 92.71,24.77 94.61,24.77 95.22,25.37 U2.13
CLK_25M_A
  Top 0.127: U7.M5 61.5,42.5 61.5,39.5 65.08,35.92 E$12.3
DA0
  Top 0.127: U6.42 84.97,52.51 82.11,55.37 69.37,55.37 68.5,54.5 68.5,53.5 U7.B11
DA1
  Top 0.127: U6.43 84.47,52.52 81.99,55 70,55 U7.A12
DA2
  Top 0.127: U7.A13 70.5,53.5 71.5,53.5 72.62,54.62 81.87,54.62 83.97,52.52 U6.44
DA3
  Top 0.127: U6.45 83.47,52.52 81.75,54.25 72.75,54.25 71.5,53 U7.B14
DA4
  Top 0.127: U7.B13 70.5,52.5 71.5,52.5 72.87,53.87 81.63,53.87 82.97,52.52 U6.46
DA5
  Top 0.127: U7.C14 71.5,52 73,53.5 81.5,53.5 82.47,52.52 U6.47
DA6
  Top 0.127: U7.D14 80.5,51 80.62,50.88 U6.50
DA7
  Top 0.127: U7.D13 70.5,50.5 80.5,50.5 80.62,50.38 U6.51
DA8
  Top 0.127: U6.52 80.88,49.88 80.5,49.5 70.5,49.5 U7.E13
DA9
  Top 0.127: U6.53 80.88,49.38 80.5,49 U7.F14
DA10
  Top 0.127: U6.54 80.88,48.88 80.5,48.5 70.5,48.5 U7.F13
DA11
  Top 0.127: U7.G14 80.5,48 80.88,48.38 U6.55
DB0
  Top 0.127: U7.H14 71.5,47 73.62,44.88 U6.62
DB1
  Top 0.127: U6.63 73.62,44.38 71.5,46.5 70.5,46.5 U7.H13
DB2
  Top 0.127: U6.2 82.47,42.73 81.5,41.75 75.75,41.75 71.5,46 U7.J14
DB3
  Top 0.127: U7.J13 70.5,45.5 71.5,45.5 75.62,41.38 81.61,41.38 82.97,42.74 U6.3
DB4
  Top 0.127: U6.4 83.47,42.73 81.75,41 74.5,41 71.5,44 U7.L14
DB5
  Top 0.127: U7.L13 70.5,43.5 71.5,43.5 74.37,40.63 81.87,40.63 83.97,42.73 U6.5
DB6
  Top 0.127: U6.6 84.47,42.73 82,40.25 74.25,40.25 71.5,43 U7.M14
DB7
  Top 0.127: U7.M13 70.5,42.5 71.5,42.5 74.12,39.88 82.13,39.88 84.97,42.73 U6.7
DB8
  Top 0.127: U7.N14 71.5,42 74,39.5 82.25,39.5 85.47,42.73 U6.8
DB9
  Top 0.127: U6.9 85.97,42.73 82.37,39.13 71.87,39.13 U7.P13
DB10
  Top 0.127: U7.P12 71.25,38.75 82.49,38.75 86.47,42.74 U6.10
DB11
  Top 0.127: U6.11 86.97,42.74 82.62,38.38 70.62,38.38 U7.P11
DCLK
  Top 0.127: U7.H12 69.5,47.5 80.5,47.5 80.62,47.38 U6.57
DIN  (via drill 0.25)
  Top 0.127: U7.B12 68.5,52.5 67.5,52.5 67.5,39.5 71,36 v71,35.88 | v71,32.5 71,27 73.35,24.65 E$44.6
  Bottom 0.127: v71,35.88 v71,32.5
DONE  (via drill 0.25)
  Top 0.127: U7.P9 66,40 70,36 v70,35.88 | v70,32.5 70,27.07 69.54,26.61 69.54,24.77 | E$3.2 69.54,24.77 | C83.1 69.54,24.77
  Bottom 0.127: v70,35.88 v70,32.5
FB
  Top 0.635: X1.1 93.34,31.75 94.61,33.02 99.69,33.02 100.01,32.7 R6.2
  Top 0.813: C5.2 X1.1
FILT1
  Top 0.635: R5.1 107,34.6 108.9,32.7 C3.2 109.22,32.07 R4.2
FILT2
  Top 0.635: R6.1 101.92,34.6 103.82,32.7 C4.2 R5.2
FPPS
  Top 0.127: E$45.7 76.51,21.9 76.2,21.59 67.94,21.59 67.31,22.23 67.31,34.19 62,39.5 U7.P5
GND  (via drill 0.25)
  Top 0.203: U6.32 89.47,51.38 88.97,50.88 | 88.97,50.88 v88.27,50.16 | U6.31 88.97,50.88 | U6.28 88.75,49.38 v88.27,48.9 88.28,48.88 U6.27 | U6.24 88.52,47.38 v88.27,47.62 | U6.21 88.75,45.88 v88.27,46.35 | U6.18 88.97,44.38 | 88.97,44.38 v88.27,45.09 87.97,44.8 U6.13 | U6.17 89.47,43.88 88.97,44.38 | U6.49 81.97,51.38 v83.19,50.16 | U6.36 87.97,50.45 | 87.97,50.45 v88.27,50.16 | U6.35 88.47,50.38 v88.27,50.16 | U6.37 87.47,50.95 87.97,50.45 | U6.15 88.97,44.38
  Top 0.305: E$12.4 64.17,23.08 v64.14,23.11 | E$3.4 67.98,23.08 v67.94,23.11 | E$12.5 64.17,18.83 v64.14,18.8 | E$3.5 68.21,18.8 v67.94,18.8 | E$44.4 74.26,18.83 v74.3,18.8 | E$44.5 74.26,23.08 v74.3,23.11 | E$45.5 77.84,23.11 v78.11,23.11 | E$45.4 78.07,18.83 v78.11,18.8
  Top 0.508: E$41.1 93.34,46.22 v93.34,45.72 | E$42.1 v88.9,39.37
  Bottom 0.508: C62.2 v33.02,50.8 | C63.2 v34.29,50.8 | C64.2 36.2,48.9 v35.56,49.53 | C65.2 36.2,47.62 v35.56,46.99 | C67.2 v33.02,45.72 | C66.2 v35.56,45.72 | C73.2 v33.02,30.48 | C72.2 v34.29,30.48 | C71.2 36.2,28.57 v35.56,29.21 | C70.2 36.2,27.3 v35.56,26.67 | C69.2 v35.56,25.4 | C68.2 v33.02,25.4 | C74.2 v64.14,23.11 | C78.2 v64.14,18.8 | C77.2 v67.94,18.8 | C79.1 v74.3,18.8 | C76.1 v74.3,23.11 | C75.2 v67.94,23.11 | C80.1 v78.11,23.11 | C81.1 v78.11,18.8
  other vias: 85.72,47.62 84.45,47.62 83.19,47.62 83.19,48.9 84.45,50.16 85.72,50.16 87,50.16 87,47.62 87,48.9 85.72,48.9 84.45,48.9 83.19,46.35 83.19,45.09 84.45,45.09 85.72,45.09 87,45.09 87,46.35 85.72,46.35 84.45,46.35 99.69,52.7 99.69,42.55 97.79,55.88 101.6,55.88 97.79,49.53 101.6,49.53 97.79,45.72 101.6,45.72 101.6,39.37 97.79,39.37 109.86,55.88 111.12,55.88 112.39,55.88 109.86,46.99 111.12,46.99 112.39,46.99 109.86,45.72 111.12,45.72 112.39,45.72 109.86,36.83 111.12,36.83 112.39,36.83 108.58,46.99 108.58,48.26 108.58,49.53 107.31,49.53 106.05,49.53 104.78,49.53 103.5,49.53 99.69,49.53 95.89,48.26 95.89,49.53 95.89,46.99 95.89,45.72 103.5,45.72 104.78,45.72 106.05,45.72 107.31,45.72 108.58,45.72 108.58,44.45 108.58,43.18 108.58,55.88 108.58,54.61 108.58,53.34 107.31,55.88 106.05,55.88 104.78,55.88 103.5,55.88 103.5,57.15 102.23,57.15 100.97,57.15 99.69,57.15 98.42,57.15 97.16,57.15 95.89,57.15 95.89,55.88 99.69,55.88 99.69,45.72 108.58,36.83 108.58,38.1 108.58,39.37 107.31,39.37 106.05,39.37 104.78,39.37 103.5,39.37 99.69,39.37 95.89,39.37 94.61,39.37 93.98,40.01 92.71,41.27 91.44,42.55 93.34,40.64 92.08,41.91 93.34,49.53 93.34,48.26 94.61,55.88 93.98,55.24 93.34,54.61 92.71,53.98 92.08,53.34 91.44,52.7 94.61,57.15 93.34,57.15 92.08,57.15 90.81,57.15 90.81,55.88 90.81,54.61 90.81,53.34 107.31,36.83 106.05,36.83 104.78,36.83 103.5,36.83 102.23,36.83 100.97,36.83 99.69,36.83 98.42,36.83 97.16,36.83 95.89,36.83 94.61,36.83 93.34,36.83 92.08,36.83 90.81,36.83 90.81,38.1 90.81,39.37 90.81,40.64 90.81,41.91 104.78,57.15 106.05,57.15 107.31,57.15 108.58,57.15 109.86,57.15 111.12,57.15 112.39,57.15 93.34,50.8 93.34,44.45 89.53,55.88 89.53,57.15 88.27,57.15 88.27,55.88 88.27,54.61 88.27,53.34 89.53,36.83 88.27,36.83 88.27,38.1 89.53,38.1 78.74,33.02 80.01,33.02 81.28,33.02 78.74,31.75 80.01,31.75 80.01,30.48 80.01,29.21 81.28,29.21 81.28,30.48 81.28,31.75 78.74,30.48 78.74,29.21 82.55,33.02 82.55,34.29 81.28,34.29 80.01,34.29 78.74,34.29 82.55,31.75 82.55,30.48 82.55,29.21 82.55,27.94 81.28,27.94 80.01,27.94 78.74,27.94 78.74,52.7 78.74,42.55 91.44,29.21 91.44,27.94 91.44,28.57 91.44,26.67 91.44,26.04 91.44,25.4 78.74,26.67 80.01,26.67 81.28,26.67 82.55,26.67 80.01,25.4 81.28,25.4 81.28,24.13 81.28,22.86 81.28,21.59 80.01,21.59 80.01,22.86 80.01,24.13 82.55,25.4 82.55,24.13 82.55,22.86 82.55,21.59 78.74,25.4 78.74,24.13 78.74,22.86 78.74,21.59 102.87,48.26 102.87,46.99 90.17,32.38 95.89,30.48 95.89,31.11 98.42,31.11 98.42,30.48 89.53,32.38 90.81,32.38 83.82,36.83 83.82,36.2 83.82,35.56 92.71,25.4 93.34,25.4 93.98,25.4 103.5,35.56 104.14,35.56 104.78,35.56 108.58,35.56 109.22,35.56 109.86,35.56 104.78,26.67 104.78,26.04 104.78,25.4 92.71,22.86 92.71,22.23 92.71,23.5 101.6,29.21 102.23,29.21 95.89,13.97 96.52,13.97 99.06,20.95 99.06,20.32 99.06,19.68 93.98,20.95 92.71,19.68 95.25,19.68 99.06,24.13 104.78,48.26 104.78,46.99 106.05,48.26 107.31,48.26 107.31,46.99 106.05,46.99 107.31,38.1 106.05,38.1 104.78,38.1 103.5,38.1 102.23,38.1 100.97,38.1 99.69,38.1 98.42,38.1 97.16,38.1 95.89,38.1 94.61,38.1 93.34,38.1 92.08,38.1 92.08,39.37 92.08,40.64 93.34,39.37 93.34,55.88 92.08,55.88 92.08,54.61 112.39,30.48 111.12,30.48 109.86,30.48 112.39,21.59 111.12,21.59 109.86,21.59 81.28,62.23 81.28,61.59 81.28,60.96 81.28,59.69 81.28,59.05 81.28,58.42 33.02,48.26 31.75,48.26 31.75,49.53 33.02,49.53 34.29,49.53 34.29,48.26 34.29,46.99 33.02,46.99 31.75,46.99 31.75,29.21 33.02,29.21 34.29,29.21 34.29,27.94 34.29,26.67 33.02,26.67 31.75,26.67 31.75,27.94 33.02,27.94 17.14,57.15 17.14,56.52 17.14,55.88 26.04,57.15 26.04,56.52 26.04,55.88 17.14,40.64 17.14,40.01 17.14,39.37 26.04,40.64 26.04,40.01 26.04,39.37 26.04,36.83 26.04,36.2 26.04,35.56 17.14,36.83 17.14,36.2 17.14,35.56 17.14,20.32 17.14,19.68 17.14,19.05 26.04,20.32 26.04,19.68 26.04,19.05 26.04,48.51 26.04,46.99 26.67,50.04 28.57,22.23 28.57,42.55 26.04,26.67 26.04,28.19 26.67,29.72 86.36,13.97 87,13.97 19.68,16.51 19.05,16.51 18.41,16.51 20.32,16.51 20.95,16.51 21.59,16.51 22.23,16.51 22.86,16.51 23.5,16.51 35.56,16.51 36.2,16.51 36.83,16.51 37.47,16.51 38.1,16.51 38.73,16.51 39.37,16.51 40.01,16.51 40.64,16.51 65.41,15.24 66.67,15.24 67.94,15.24 67.94,13.97 66.67,13.97 65.41,13.97 66.67,8.89 66.67,8.26 66.67,7.62 105.41,12.7 105.41,12.06 105.41,11.43 105.41,10.16 105.41,9.53 105.41,8.89 105.41,7.62 105.41,6.99 105.41,6.35 73.66,4.45 74.3,4.45 73.66,6.99 74.3,6.99 88.9,10.79 90.17,10.79 91.44,10.79 92.71,10.79 92.71,9.53 91.44,9.53 90.17,9.53 88.9,9.53 88.9,8.26 88.9,6.99 90.17,6.99 90.17,8.26 91.44,8.26 91.44,6.99 92.71,6.99 92.71,8.26 58,54 61,53 59,52 58,50 60,50 60,48 58,45 58,41 60,42 62,42 61,44 62,45 63,46 62,47 63,48 62,49 63,50 62,51 63,52 64,53 64,52 64,51 65,50 66,51 66,52 66,53 66,54 63,54 68,54 71,54 70,52 68,51 67,50 66,49 67,48 66,47 67,46 66,45 67,44 68,44 65,44 64,45 63,44 66,42 69,42 71,41 71,45 71,50 65,52 69,48 74,46 78.5,46 72.5,40 75.5,43.5 73.5,52 73.5,50 78.5,50 72.5,43.75 74.5,41.75 85.72,57.15 83.19,57.15 80.64,57.15 78.11,57.15 75.56,57.15 85.72,54.61 73.03,57.15 70.48,57.15 85.72,38.1 85.72,39.37 85.72,40.64 86.36,41.27 84.45,39.37 84.45,38.1 83.19,38.1 81.92,37.47 79.38,37.47 76.83,37.47 74.3,37.47 71.75,37.47 70.48,37.47 69.22,38.73 68.58,39.37 69.85,38.1 73.03,37.47 75.56,37.47 78.11,37.47 80.64,37.47 64,42 111.12,35.56 111.12,34.29 111.12,33.02 111.12,31.75 112.39,35.56 112.39,34.29 112.39,33.02 112.39,31.75 108.58,58.42 107.31,58.42 107.31,60.96 106.05,58.42 104.78,58.42 103.5,58.42 102.23,58.42 100.97,58.42 99.69,58.42 98.42,58.42 97.16,58.42 95.89,58.42 94.61,58.42 93.34,58.42 92.08,58.42 90.81,58.42 89.53,58.42 104.78,60.96 102.23,60.96 99.69,60.96 97.16,60.96 94.61,60.96 92.08,60.96 89.53,60.96 31.75,30.48 30.48,30.48 30.48,29.21 30.48,27.94 30.48,26.67 30.48,25.4 31.75,25.4 34.29,25.4 35.56,27.94 35.56,30.48 30.48,50.8 31.75,50.8 35.56,50.8 35.56,48.26 34.29,45.72 31.75,45.72 30.48,45.72 30.48,46.99 30.48,48.26 30.48,49.53 91.44,17.14 91.44,16.51 64.75,39.5 68.13,36.12 71.75,31.75 71.75,29.21 68.58,31.11 68.58,27.94 71.12,22.23 66.08,31.11 66.08,27.94
  pour Bottom (isolate 0.254, rank 6): 16.51,62.87 113.67,62.87 113.67,0.64 16.51,0.64
  pour Top (isolate 0.254, rank 6): 16.51,62.87 113.67,62.87 113.67,0.64 48.26,0.64 48.26,6.71 46.22,8.76 16.51,8.76
  pour Top (isolate 0.254, rank 6, no thermals): 87.63,34.29 87.63,20.95 78.74,20.95 78.74,34.29
  pour Route2 (isolate 0.254, rank 6): 16.51,62.87 100.97,62.87 100.97,0.64 16.51,0.64
  pour Top (isolate 0.254, no thermals): 56.52,55.24 72.39,55.24 72.39,39.37 56.52,39.37
IF1
  Top 0.635: T1.6 J3.SIG
IF2
  Top 0.635: T2.6 J4.SIG
INV  (via drill 0.25)
  Top 0.254: v97.79,26.04 97.78,26.02 U2.12 | U11.1 93.31,14.56 v93.98,15.24
  Bottom 0.254: v93.98,15.24 97.79,19.05 v97.79,26.04
LCLK
  Top 0.254: U2.3 U2.4
OCLK
  Top 0.254: U2.11 99.69,26.67 101,25.37 | U2.2 101,25.37 | U3.3 88.92,17.16 93.34,21.59 97.79,21.59 101,24.8 101,25.37
PDI_CLK
  Top 0.254: U11.35 94.84,6.89 96.52,5.21 96.52,3.81 97.16,3.17 102.23,3.17 PDI.5
PDI_DAT
  Top 0.254: U11.34 94.58,6.39 95.89,5.08 95.89,3.17 97.16,1.91 PDI.1
POE+  (via drill 0.25)
  Top 0.635: v2.54,12.7 C28.1 1.91,13.02 v1.91,12.7 1.91,13.34 2.54,13.97 3.17,13.34 v3.17,12.7 | v4.45,12.7 4.45,13.34 5.08,13.97 5.71,13.34 v5.71,12.7 | v5.08,12.7 C29.1
  Top 1.27: E$10.6 19.05,3 v19.05,3.17 | E$11.6 36.2,3 v36.2,3.17
  Bottom 0.254: D3.+ 6.99,45.41 v6.99,45.72 | D4.+ 10.79,51.42 v10.79,51.44 | D6.+ v10.79,31.11 | D5.+ v7,25.39 v6.99,25.4
  Bottom 1.27: 18.41,6.99 34.92,6.99 36.27,5.63 E$11.6 | E$10.6 19.13,6.27 18.41,6.99 | 18.41,6.99 12.7,12.7 v5.71,12.7 v5.08,12.7 v4.45,12.7 v3.81,12.7 v3.17,12.7 v2.54,12.7 v1.91,12.7 | E$10.6 19.13,2.62 v19.05,2.54 | E$10.6 19.05,3 v19.05,3.17 v19.05,3.81 | E$11.6 36.27,2.62 v36.2,2.54 | E$11.6 36.2,3 v36.2,3.17 v36.2,3.81
  other vias: 10.79,50.8 6.99,45.09 10.79,30.48 6.99,24.77
  pour Route15 (isolate 0.508): 0.64,62.87 15.24,62.87 15.24,0.64 0.64,0.64
POE-  (via drill 0.25)
  other vias: 4.45,45.09 4.45,45.72 13.34,51.44 13.34,50.8 4.45,25.4 4.45,24.77 13.34,31.11 13.34,30.48 6.99,17.78 7.62,17.78 8.26,17.78 8.89,17.78 8.89,17.14 8.89,16.51 8.89,15.88 6.99,15.88 6.99,16.51 6.99,17.14 6.35,17.14 5.71,17.14 5.08,17.14 4.45,17.14 3.81,17.14 3.17,17.14 2.54,17.14 1.91,17.14
  pour Bottom (isolate 0.508): 0.64,62.87 15.24,62.87 15.24,0.64 0.64,0.64
  pour Route2 (isolate 0.508): 0.64,62.87 15.24,62.87 15.24,0.64 0.64,0.64
  pour Top (isolate 0.508, rank 2): 0.64,62.87 15.24,62.87 15.24,0.64 0.64,0.64
  pour Top (isolate 0.254, rank 2, no thermals): 1.27,18.41 9.53,18.41 9.53,15.24 1.27,15.24
POE_SW  (via drill 0.25)
  Top 0.254: E$11.1 46.27,3.73 v46.35,3.81 | 29.13,3.1 E$7.6 29.13,3.73 v29.21,3.81
  Top 1.27: 28.57,6.99 45.09,6.99 46.27,5.79 E$11.1 46.27,3.1 v46.35,3.17 | 28.57,6.99 29.13,6.43 29.13,3.1 v29.21,3.17 | E$7.6 29.21,2.83 v29.21,2.54 | Q1.3 12.11,6.99 28.57,6.99
  Bottom 1.27: v29.21,3.17 29.13,3.1 E$7.6 29.21,2.83 v29.21,2.54 | v46.35,3.17 46.27,3.1 E$11.1 46.35,2.83 v46.35,2.54
  pour Top (isolate 0.508, no thermals): 3.81,14.61 15.24,14.61 15.24,0.64 0.64,0.64 0.64,14.61
PPS
  Top 0.254: E$45.2 76.51,19.36 76.83,19.68 82.55,19.68 84.45,17.78 84.45,16.51 85.11,15.86 U3.5
RECT1
  Top 1.27: E$6.9 E$6.8 E$6.7 48.52,14.87 48.9,15.24 49.27,15.62 D7.1
RECT2  (via drill 0.25)
  Bottom 1.27: E$11.10 E$11.11 E$11.12 48,14.87 v50.16,12.7
  other vias: 50.8,12.7 50.8,12.06 50.8,11.43 50.8,10.79 50.16,12.06 50.16,11.43 50.16,10.79
  pour Top (isolate 0.254, no thermals): 49.53,10.16 51.44,10.16 51.44,13.34 49.53,13.34
  pour Bottom (isolate 0.254, no thermals): 49.53,10.16 49.53,13.34 51.44,13.34 51.44,10.16
RECT3
  Top 1.27: E$7.9 E$7.8 E$7.7 29.21,14.79 29.21,12.7 33.02,8.89 45.72,8.89 47.25,7.36 D8.1
RECT4  (via drill 0.25)
  Bottom 1.27: E$10.10 E$10.11 E$10.12 29.13,12.78 33.02,8.89 45.72,8.89 v50.16,4.45
  other vias: 50.16,3.81 50.8,3.81 50.8,4.45 50.8,3.17 50.8,2.54 50.16,2.54 50.16,3.17
  pour Top (isolate 0.254, no thermals): 49.53,5.08 51.44,5.08 51.44,1.91 49.53,1.91
  pour Bottom (isolate 0.254, no thermals): 49.53,5.08 49.53,1.91 51.44,1.91 51.44,5.08
REF
  Top 0.254: J5.SIG R1.1 C1.1
S$1
  Top 0.127: U6.26 92.19,48.38 92.71,48.9 96.52,48.9 97.16,48.26 E$15.2 97.29,48.26 E$13.1
S$2
  Top 0.508: E$17.2 T1.2
S$3
  Top 0.508: E$18.2 T2.2
S$4
  Top 0.635: D1.1 R8.2
S$5
  Top 0.635: D2.1 R9.2
S$6  (via drill 0.25)
  Top 0.127: U6.23 91.33,46.88 91.44,46.99 v94.61,46.99
  Top 0.254: E$38.1 v96.52,52.7 | v96.52,52.7 E$26.1 | v96.52,52.7 E$25.2 | E$39.1 v96.52,42.55 | v96.52,42.55 E$34.1 | v96.52,42.55 E$35.2
  Bottom 0.254: v96.52,52.7 94.61,50.8 v94.61,46.99 94.61,44.45 v96.52,42.55
S$7
  Top 0.254: T1.3 101.6,53.98 | 101.6,53.98 E$20.2 | E$19.2 101.6,53.98
S$8
  Top 0.254: E$20.1 97.92,53.98 E$21.1 97.42,54.48 E$26.2 95.75,54.48 95.11,53.84 E$27.1
S$9
  Top 0.254: E$23.1 97.92,51.44 E$24.2 97.42,50.94 E$25.1 95.75,50.94 95.11,51.57 E$28.1
S$10
  Top 0.254: T1.1 101.6,51.44 | 101.6,51.44 E$23.2 | E$40.1 101.6,51.44
S$11
  Top 0.254: T2.3 101.6,43.81 | 101.6,43.81 E$31.2 | E$22.2 101.6,43.81
S$12
  Top 0.254: T2.1 101.6,41.27 | 101.6,41.27 E$30.2 | E$29.1 101.6,41.27
S$13
  Top 0.254: E$36.1 95.11,43.68 95.75,44.31 E$34.2 97.42,44.31 E$32.1 97.92,43.81 E$31.1
S$14
  Top 0.254: E$37.1 95.11,41.41 95.75,40.77 E$35.1 97.42,40.77 E$33.2 97.92,41.27 E$30.1
S$15
  Top 0.127: U6.30 91.15,50.38 E$27.2
S$16
  Top 0.127: U6.29 91.28,49.88 93.48,52.07 E$28.2
S$17
  Top 0.127: U6.20 91.28,45.38 93.48,43.18 E$36.2
S$18
  Top 0.127: U6.19 91.15,44.88 E$37.2
S$19
  Top 0.127: U6.25 92.46,47.88 92.71,47.62 96.66,47.62 E$15.1 97.29,46.99 E$14.1
S$20  (via drill 0.25)
  Top 0.127: E$13.2 v100.33,48.26 E$16.1 | v96.52,35.56 96.08,35.12 X1.NC1
  Bottom 0.127: v100.33,48.26 99.06,46.99 99.06,38.1 v96.52,35.56
S$21  (via drill 0.25)
  Top 0.127: E$14.2 v100.33,46.99 E$46.1 | v99.06,35.56 98.62,35.12 X1.3
  Bottom 0.127: v99.06,35.56 100.33,36.83 v100.33,46.99
S$22
  Top 0.254: J1.11 24.51,50.67 25.78,50.67 26.12,51.01 U8.1
S$23
  Top 0.254: J1.10 22.98,50.16 26.04,50.16 26.39,50.52 28.77,50.52 28.79,50.51 U8.2
S$24
  Bottom 0.635: J1.6 20.32,56.2 C14.1
S$25
  Bottom 0.635: J1.12 22.86,56.2 C15.1
S$26
  Bottom 0.635: J1.1 20.32,40.33 C18.1
S$27
  Bottom 0.635: C16.1 22.86,40.33 J1.7
S$28
  Bottom 0.635: J2.6 20.32,35.88 C19.1
S$29
  Bottom 0.635: J2.12 22.86,35.88 C17.1
S$30
  Bottom 0.635: J2.1 20.32,20 C20.1
S$31
  Bottom 0.635: J2.7 22.86,20 C21.1
S$32  (via drill 0.25)
  Top 0.254: U8.5 23.86,49.01 23.62,48.77 v22.86,48.77
  Bottom 0.254: J1.5 v22.86,48.77
S$33
  Top 0.254: J1.4 23.37,49.27 23.6,49.51 U8.4
S$34
  Top 0.254: J1.3 21.09,48.01 U8.7
S$35
  Top 0.254: J1.2 22.61,47.51 U8.8
S$36
  Top 0.254: U8.10 28.78,46.51 28.77,46.51 25.17,46.51 J1.8
S$37  (via drill 0.25)
  Top 0.254: v25.4,45.97 25.44,46.01 U8.11
  Bottom 0.254: J1.9 25.14,46.23 v25.4,45.97
S$38
  Top 0.254: U9.1 26.12,30.69 25.78,30.35 24.51,30.35 J2.11
S$39
  Top 0.254: J2.10 22.99,29.84 26.03,29.84 26.39,30.2 28.77,30.2 28.79,30.19 U9.2
S$40
  Top 0.254: J2.4 23.37,28.95 23.6,29.19 U9.4
S$41  (via drill 0.25)
  Top 0.254: U9.5 23.86,28.69 23.62,28.45 v22.86,28.45
  Bottom 0.254: J2.5 v22.86,28.45
S$42
  Top 0.254: U9.7 21.09,27.69 J2.3
S$43
  Top 0.254: J2.2 22.61,27.19 U9.8
S$44
  Top 0.254: U9.10 28.78,26.19 28.77,26.19 25.17,26.19 J2.8
S$45  (via drill 0.25)
  Top 0.254: v25.4,25.65 25.44,25.69 U9.11
  Bottom 0.254: J2.9 25.14,25.91 v25.4,25.65
S$46
  Top 0.254: U8.12 29,45.51 28.57,45.09 R10.1
S$47
  Top 0.254: U9.12 29,25.19 28.57,24.77 R11.1
S$48
  Bottom 0.635: D3.AC1 8.59,52.7 12.7,52.7 13.2,53.2 J1.14
S$49
  Bottom 0.635: D3.AC2 4.76,51.12 7.5,53.85 J1.16
S$50
  Bottom 0.635: J1.15 11.74,44.45 D4.AC1
S$51
  Bottom 0.635: J1.13 13.2,45.26 D4.AC2
S$52
  Bottom 0.635: D5.AC1 8.59,32.38 12.7,32.38 13.2,32.88 J2.14
S$53
  Bottom 0.635: J2.16 7.5,33.53 4.76,30.8 D5.AC2
S$54
  Bottom 0.635: J2.13 13.2,24.94 D6.AC2
S$55
  Bottom 0.635: J2.15 11.74,24.13 D6.AC1
S$56
  Top 0.635: E$7.2 21.13,4.37 21.72,4.95 24.64,4.95 25.13,4.46 E$7.4
S$57
  Top 0.635: E$6.2 38.27,4.37 38.86,4.95 41.78,4.95 42.27,4.46 E$6.4
S$58
  Top 0.635: E$7.3 23.13,1.44 23.75,0.83 26.42,0.83 27.13,1.54 E$7.5
S$59
  Top 0.635: E$6.3 40.27,1.32 40.77,0.83 43.81,0.83 44.27,1.29 E$6.5
S$60
  Top 0.635: D9.1 R7.2
S$61
  Top 0.635: D10.1 R12.2
S$62
  Top 0.635: D11.1 R13.2
S$63
  Top 0.127: U7.A10 67,55.58 73.02,61.59 R8.1
S$64
  Top 0.508: Q2.B 90.17,1.59 R14.1
S$65
  Top 0.127: U7.B10 67.5,53.5 67.5,55.5 71.06,59.05 R9.1
S$67
  Top 0.254: U11.44 95.84,11.39 96.52,12.06 R7.1
S$68
  Top 0.254: U11.43 95.79,10.89 97.16,9.53 R12.1
S$69
  Top 0.254: U11.42 95.53,10.39 96.52,9.4 96.52,7.62 97.16,6.99 R13.1
S$70
  Top 0.127: U7.M6 63.5,42.5 63.5,39.5 68.71,34.29 74.55,34.29 75.44,33.4 75.44,29.08 JTAG.4
S$71
  Top 0.127: U7.P6 63,39.5 68.59,33.91 73.41,33.91 JTAG.8
S$72
  Top 0.127: U7.P7 64,39.5 68.83,34.67 73.41,34.67 JTAG.10
S$73
  Top 0.127: U7.A7 63.5,53.5 63.5,52.5 62.5,52.5 62.5,39.5 68.47,33.53 72.26,33.53 74.3,31.5 JTAG.6
SCLK
  Top 0.254: U11.17 76.2,8.89 75.03,7.71 J6.SCLK
SDI  (via drill 0.25)
  Top 0.254: J6.DI 77.22,8.01 v77.47,8.26 | U11.15 77.74,9.89 v77.47,10.16
  Bottom 0.254: v77.47,8.26 v77.47,10.16
SDO
  Top 0.254: U11.16 74.8,9.39 72.83,7.42 J6.DO
SR1
  Top 0.254: J6.RSV2 71.72,7.59 75.56,11.43 79.38,11.43 79.92,10.89 U11.13
SR2
  Top 0.254: U11.20 80.42,7.39 79.42,6.4 J6.RSV1
V1.0  (via drill 0.25)
  Top 0.254: U9.6 v28.58,28.19 v28.57,28.19 | U9.42 v33.27,32.38 | U9.31 37.33,28.19 v37.47,28.32 | U9.24 35.77,23.54 v35.81,23.5 | U8.6 v28.58,48.51 v28.57,48.51 | U8.24 35.77,43.86 v35.81,43.81 | U8.31 37.33,48.51 v37.47,48.64 | U8.42 v33.27,52.7
  Bottom 0.508: C23.1 v28.57,48.51 | C26.1 v28.57,28.19 | C64.1 37.33,48.78 v37.47,48.64 | C62.1 33.14,52.57 v33.27,52.7 | C66.1 35.68,43.95 v35.81,43.81 | C73.1 33.14,32.25 v33.27,32.38 | C71.1 37.33,28.46 v37.47,28.32 | C69.1 35.68,23.63 v35.81,23.5
  other vias: 62,50 63,51 64,50 65,51 66,50 63,49 62,48 63,47 62,46 63,45 65,45 66,46 66,48
  pour Bottom (isolate 0.254): 27.94,55.24 72.39,55.24 72.39,20.95 27.94,20.95
  pour Route15 (isolate 0.254, no thermals): 61,51 62,52 66.5,52 66.5,44.5 65,44.5 65,43.5 61,43.5
  pour Bottom (isolate 0.254, no thermals): 56.52,55.24 56.52,39.37 72.39,39.37 72.39,55.24
V1.8  (via drill 0.25)
  Top 0.127: U7.M8 U7.M9 C42.2 65.5,44.5 63.5,44.5 63.5,43.5 U7.M7
  Top 0.203: 81.34,52.65 v81.28,52.7 | 81.34,42.6 v81.28,42.55
  Top 0.254: U9.41 33.77,32.25 v33.91,32.38 | U9.30 v37.46,27.69 v37.47,27.69 | U9.19 v33.27,23.5 | U8.19 v33.27,43.81 | U8.30 v37.47,48.01 | U8.41 33.77,52.57 v33.91,52.7 | v81.28,52.7 81.33,52.7 U6.48 | U6.1 81.33,42.55 v81.28,42.55
  Top 0.305: E$12.1 66.64,23.08 v66.67,23.11 | E$3.1 70.22,23.11 v70.48,23.11 | E$44.8 71.79,23.08 v71.75,23.11 | E$45.8 75.6,23.08 v75.56,23.11
  Top 0.508: E$9.2 v81.28,52.7 | E$4.2 v81.28,42.55 | C82.1 v67.94,29.46 | C83.2 v71.12,24.77
  Bottom 0.508: C65.1 37.33,47.87 v37.47,48.01 | C63.1 34.04,52.57 v33.91,52.7 | C67.1 33.14,43.95 v33.27,43.81 | C72.1 34.04,32.25 v33.91,32.38 | C70.1 37.33,27.55 v37.47,27.69 | C68.1 33.14,23.63 v33.27,23.5 | C74.1 v66.67,23.11 | C76.2 v71.75,23.11 | C75.1 v70.48,23.11 | C80.2 v75.56,23.11
  other vias: 59,48 59,45 59,42 63,42 65,42 70,42 70,45 70,48 66,44 67,45 67,47 67,49 61,52 69,52 59,43 69,45
  pour Route15 (isolate 0.254, rank 6): 16.51,62.87 113.67,62.87 113.67,0.64 16.51,0.64
V2.5  (via drill 0.25)
  Top 0.254: U9.3 28.6,29.69 v28.57,29.72 | U9.9 28.59,26.69 v28.57,26.67 | U8.3 28.6,50.01 v28.57,50.04 | U8.9 28.59,47.01 v28.57,46.99
  Bottom 0.508: C22.1 v28.57,50.04 | C24.1 v28.57,46.99 | C25.1 v28.57,29.72 | C27.1 v28.57,26.67
  pour Route15 (isolate 0.254): 27.94,52.07 31.11,52.07 31.11,24.13 27.94,24.13
V3.3  (via drill 0.25)
  Top 0.254: U1.14 101.98,20.25 C11.2 | U3.13 U3.14 93.62,18.46 C12.2 | C10.2 95.89,22.86 95.89,23.5 96.14,23.75 U2.14 | 92.47,15.88 U3.10 93.33,15.86 v93.34,15.88 | U3.1 85.77,18.46 v85.72,18.41 | U3.4 v85.72,16.51
  Top 0.635: C6.2 89.22,35.24 | C11.2 102.55,20.95 v102.87,20.95 | 95.89,22.86 v96.52,22.86 | C12.2 v93.98,17.14
  Top 0.813: X1.4 90.29,35.12 C6.2 89.22,35.24 v88.9,35.56 | 89.22,35.24 v88.9,34.92
  other vias: 85.72,27.3 86.36,27.3 87,27.3
  pour Top (isolate 0.254): 84.45,29.84 84.45,24.77 88.9,24.77 88.9,29.84
  pour Route15 (isolate 0.254): 83.82,36.2 113.67,36.2 113.67,13.34 83.82,13.34
V3.3D  (via drill 0.25)
  Top 0.254: U11.19 86.72,7.89 v86.36,8.26 | U11.9 89.31,13.11 v89.53,13.34 | U11.39 v95.25,8.89 | U11.31 92.31,4.67 v92.08,4.45
  Top 0.305: E$12.8 66.64,18.83 v66.67,18.8 | E$3.8 70.45,18.83 v70.48,18.8 | E$44.1 72.02,18.8 v71.75,18.8 | E$45.1 75.83,18.8 v75.56,18.8
  Top 0.508: 69.06,8.26 U10.3 69.14,8.33 v69.22,8.26 | v89.53,3.17 89.22,3.49 Q2.E 89.22,3.49 v89.53,3.81
  Top 1.016: C30.1 68.89,8.24 U10.3
  Route15 0.508: v89.53,13.34 89.53,12.7
  Bottom 0.508: C59.1 v89.53,13.34 | C58.2 v86.36,8.26 | C60.2 v95.25,8.89 | C61.1 v92.08,4.45 | C78.1 v66.67,18.8 | C77.1 v70.48,18.8 | C79.2 v71.75,18.8 | C81.2 v75.56,18.8
  other vias: 69.22,7.62 69.22,8.89
  pour Route15 (isolate 0.254): 66.04,0.64 66.04,19.05 83.19,19.05 83.19,12.7 113.67,12.7 113.67,0.64
V5  (via drill 0.25)
  Top 0.508: v60.96,17.14 64.77,20.95 86.06,20.95 U4.1 | U10.1 64.29,8.26 v60.96,8.26
  other vias: 53.34,17.14 54.61,17.14 55.88,17.14 57.15,17.14 58.42,17.14 59.69,17.14 53.34,15.88 54.61,15.88 55.88,15.88 57.15,15.88 58.42,15.88 59.69,15.88 60.96,15.88 53.34,14.61 54.61,14.61 55.88,14.61 57.15,14.61 58.42,14.61 59.69,14.61 60.96,14.61 53.34,13.34 54.61,13.34 55.88,13.34 57.15,13.34 58.42,13.34 59.69,13.34 60.96,13.34 53.34,12.06 54.61,12.06 55.88,12.06 57.15,12.06 58.42,12.06 59.69,12.06 60.96,12.06 53.34,10.79 54.61,10.79 55.88,10.79 57.15,10.79 58.42,10.79 59.69,10.79 60.96,10.79 53.34,9.53 54.61,9.53 55.88,9.53 57.15,9.53 58.42,9.53 59.69,9.53 60.96,9.53 53.34,8.26 54.61,8.26 55.88,8.26 57.15,8.26 58.42,8.26 59.69,8.26 53.34,6.99 54.61,6.99 55.88,6.99 57.15,6.99 58.42,6.99 59.69,6.99 60.96,6.99 53.34,5.71 54.61,5.71 55.88,5.71 57.15,5.71 58.42,5.71 59.69,5.71 60.96,5.71 53.34,4.45 54.61,4.45 55.88,4.45 57.15,4.45 58.42,4.45 59.69,4.45 60.96,4.45 53.34,3.17 54.61,3.17 55.88,3.17 57.15,3.17 58.42,3.17 59.69,3.17 60.96,3.17 53.34,1.91 54.61,1.91 55.88,1.91 57.15,1.91 58.42,1.91 59.69,1.91 60.96,1.91
  pour Route15 (isolate 0.508, rank 2): 16.51,17.78 61.59,17.78 61.59,0.64 16.51,0.64
  pour Top (isolate 0.508, no thermals): 52.7,17.78 61.59,17.78 61.59,0.64 52.7,0.64
VSDC  (via drill 0.25)
  Top 0.508: Q2.C 86.53,3 85.72,3.81 76.83,3.81 76.2,4.45 v76.2,5.08 76.2,5.54 J6.VCC 76.12,6.28 v76.2,6.35
  Bottom 0.508: v76.2,5.08 v76.2,5.71 v76.2,6.35 76.2,7.3 C13.1

## Text on the board
tPlace: PPS | ACTIVE | SYNC | READY | FLASH